# Altium PCB PCB1.PcbDoc
Units mm, origin at the board's own origin, x right, y up, seen from the top; angles counter-clockwise.
Board outline 78 x 72 mm, 2 copper layers (Top Layer, Bottom Layer); 28 components, 23 nets, 128 pads, 13 vias.
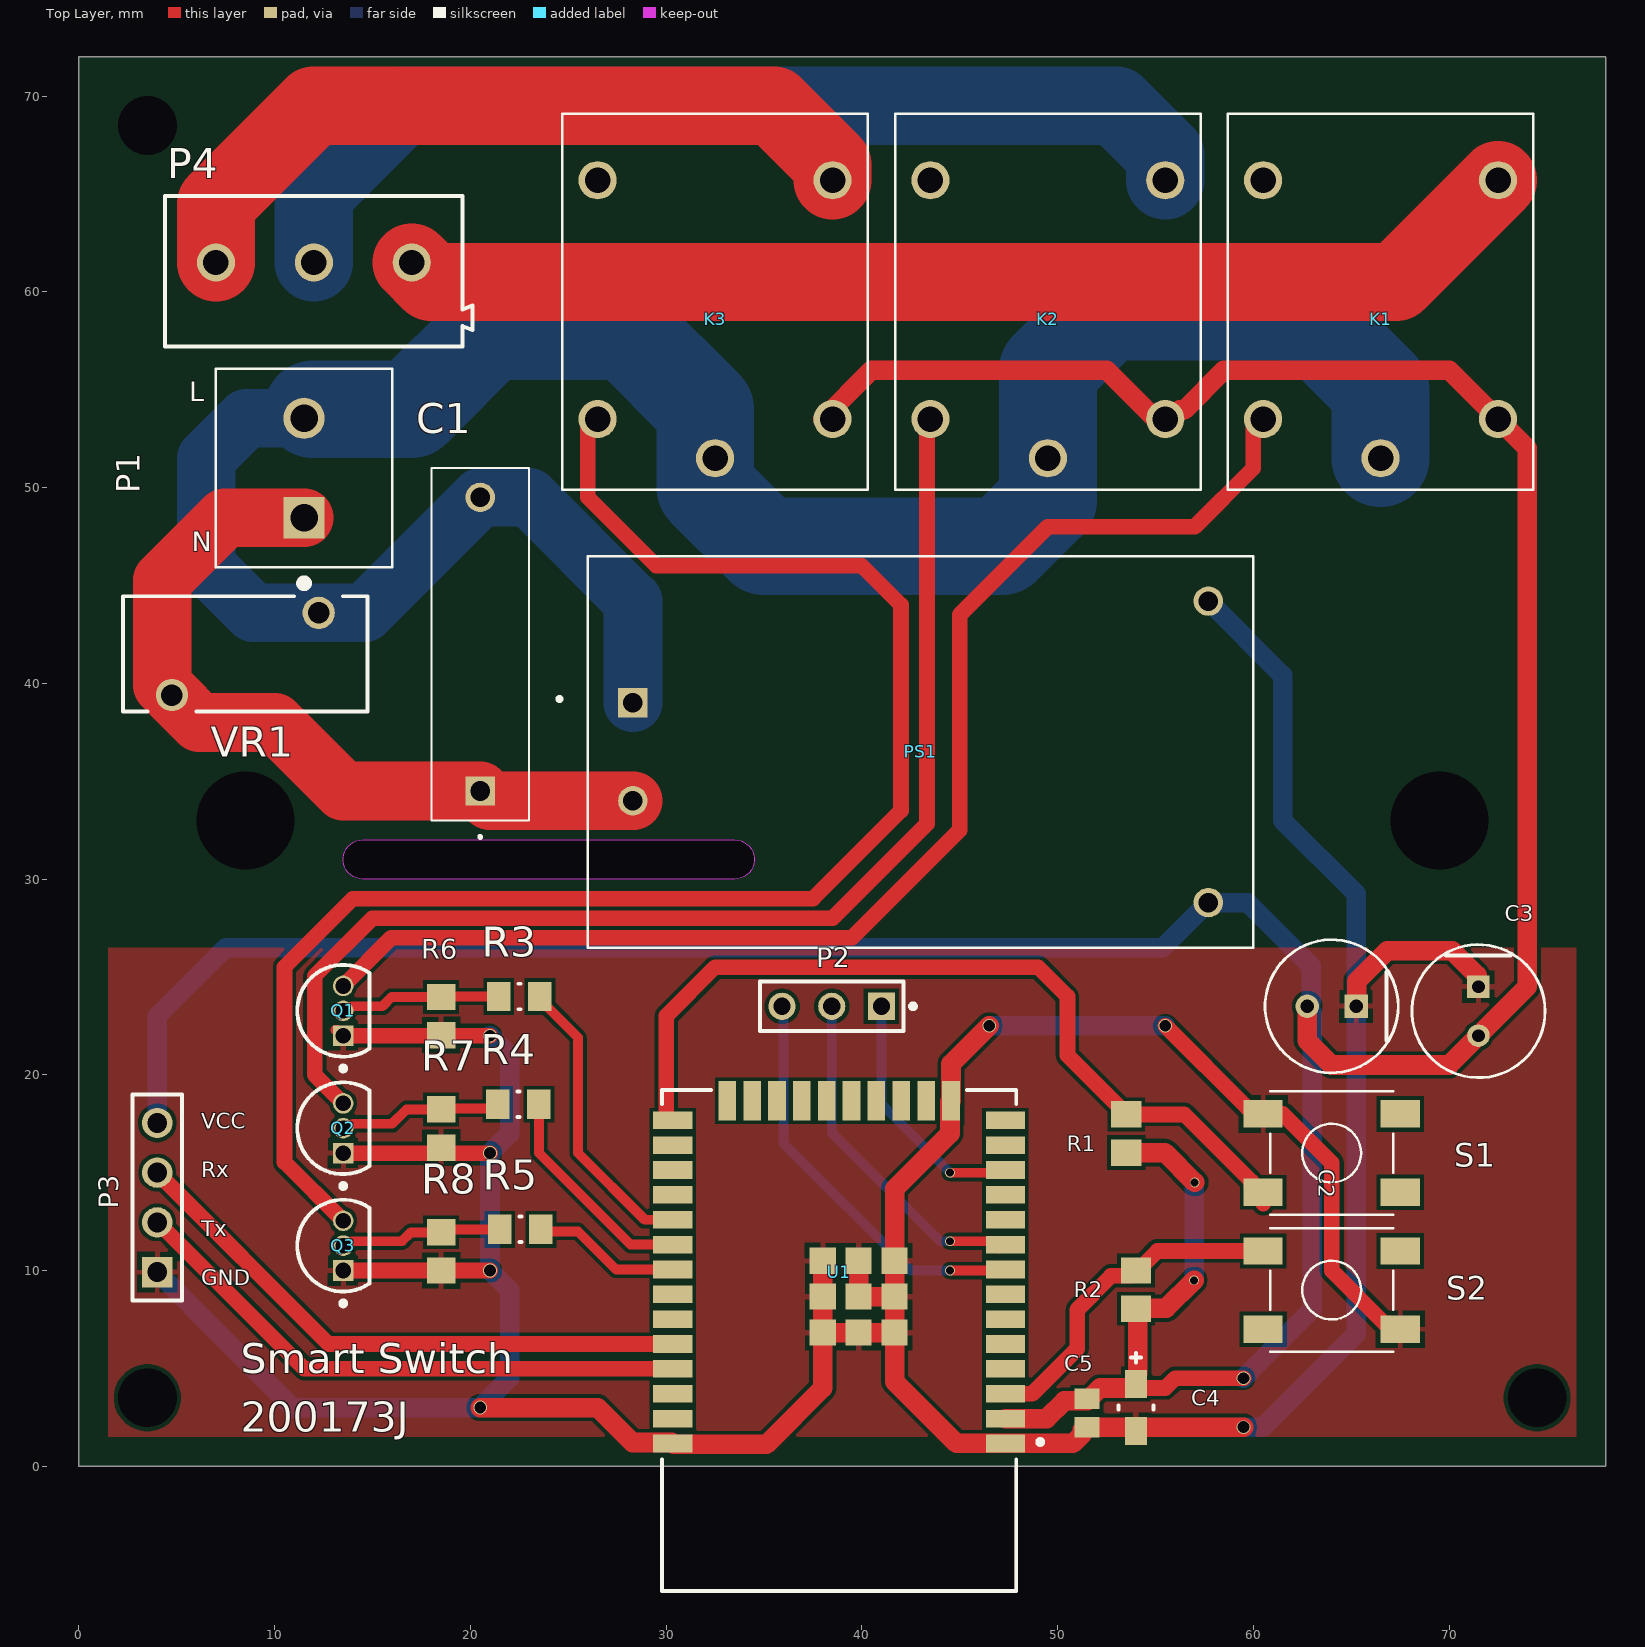
[diagram p0: Top Layer view]
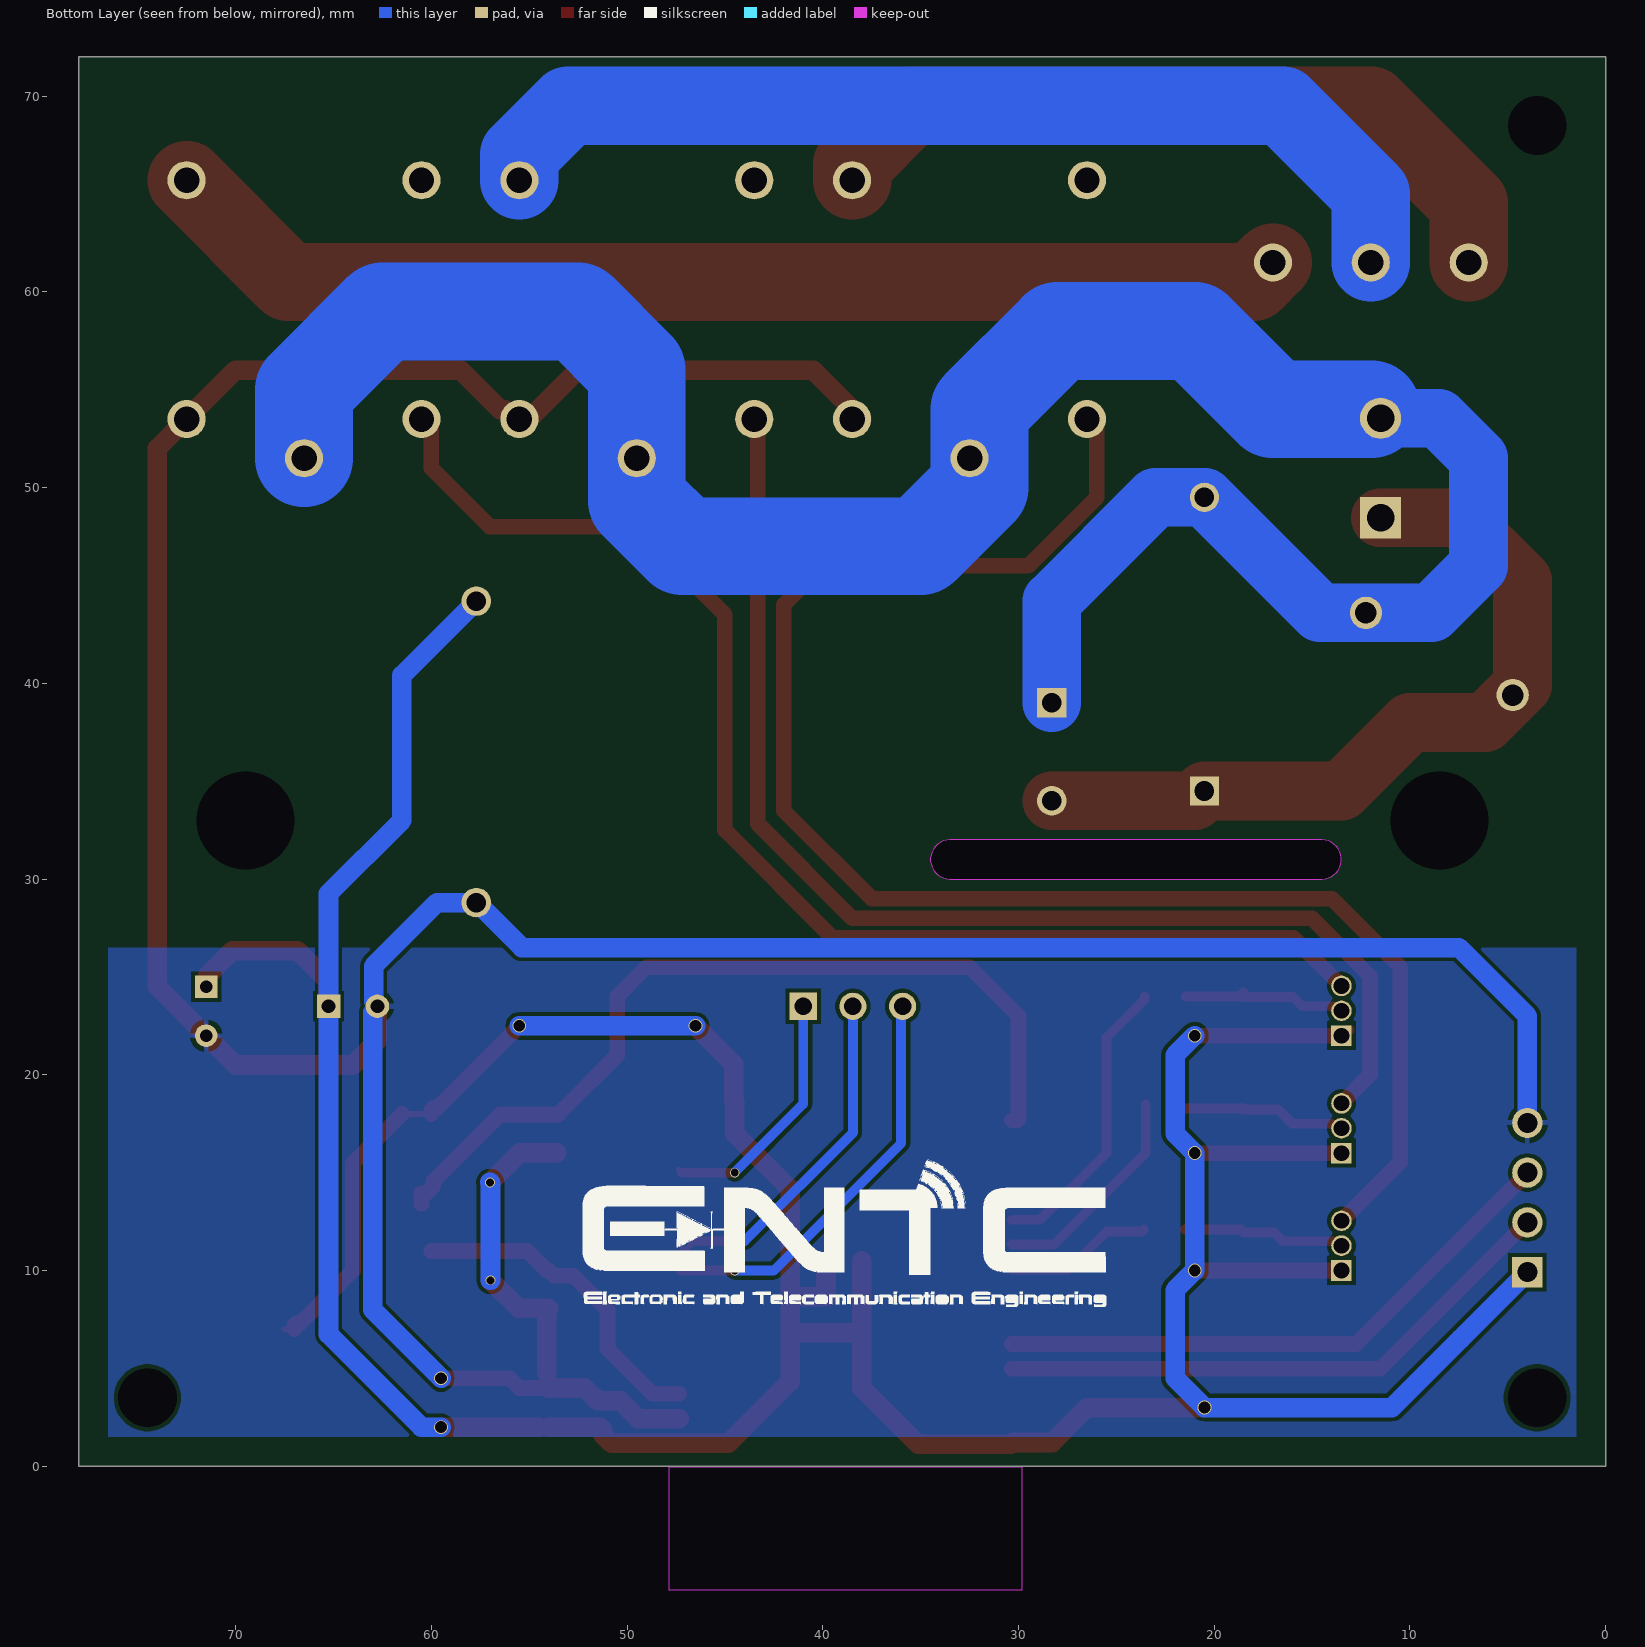
[diagram p1: Bottom Layer view, seen from below]
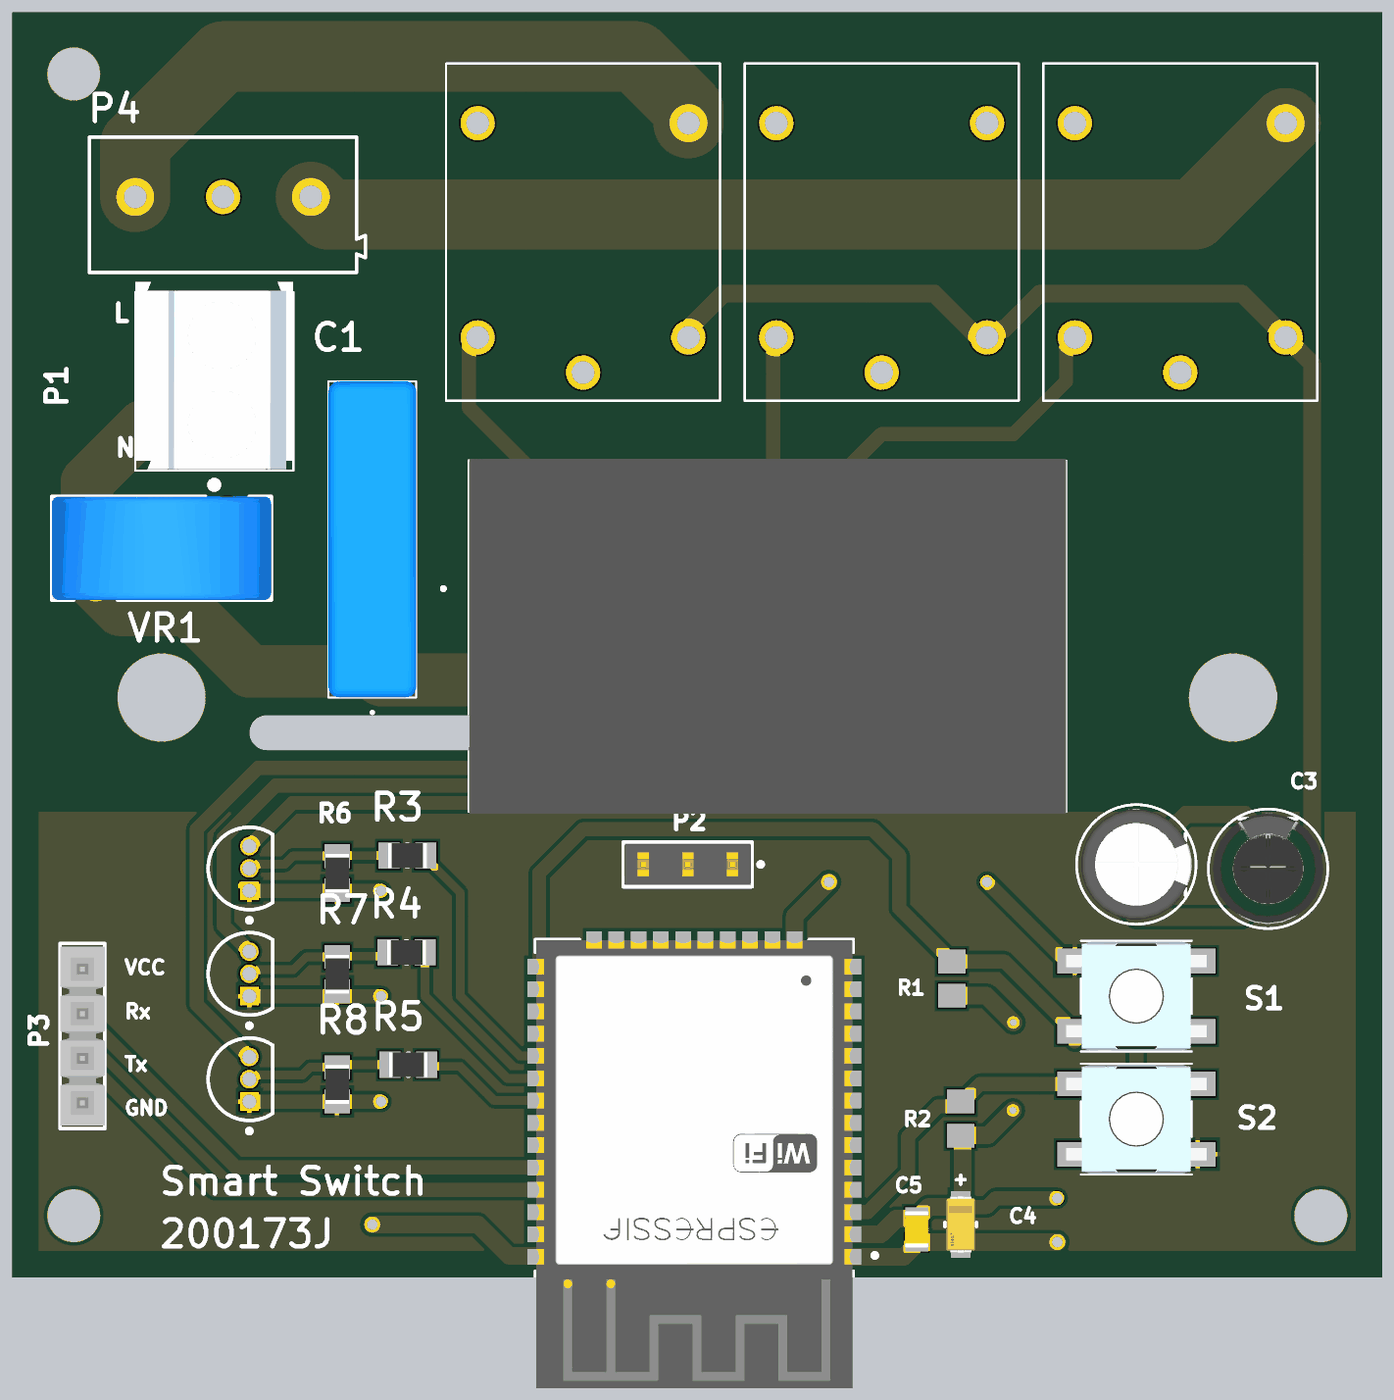
[diagram p2: 3D render of the assembled board from above, using the file's embedded part models]

## Layer stack, top to bottom
Top Solder: solder mask 0.0102, Solder Resist, Dk 3.5
Top Layer: signal copper 0.0356
Dielectric 1: dielectric 0.32, FR-4, Dk 4.8
Bottom Layer: signal copper 0.0356
Bottom Solder: solder mask 0.0102, Solder Resist, Dk 3.5

## Board outline
0,72 0,0 78,0 78,72
cut-out: 14.5,32 33.5,32 cw(c33.5,31) 33.5,30 14.5,30 cw(c14.5,31)

## Design rules (kind name [scope] priority, off if disabled: settings)
Clearance [All] p1: gap=0.2 ignorepadtopadclearanceinfootprint=TRUE except(0.127: Arc-Arc Arc-Track Track-Track SMDPad-SMDPad; 0.254: Arc-Via Track-Via Via-Via; 0.33: Arc-Hole Track-Hole; 0.5: THPad-THPad)
HoleSize [All] p1: absolutevalues=TRUE maxlimit=5 minlimit=0.3 maxpercent=80.000 minpercent=20.000
MinimumSolderMaskSliver [All] p1: minsoldermaskwidth=0.015
PolygonConnect [All] p1: connectstyle=Relief reliefconductorwidth=0.254 reliefentries=4 polygonreliefangle="90 Angle" airgapwidth=0.254
RoutingVias [All] p1: holewidth=0.4 width=0.5 viastyle="Through Hole" minholewidth=0.4 minwidth=0.5 maxholewidth=0.4 maxwidth=0.5
SilkToSilkClearance [All] p1: silktosilkclearance=0.1
SilkToSolderMaskClearance [IsPad] p1: minsilkscreentomaskgap=0.2 clearancetoexposedcopper=TRUE
SolderMaskExpansion [All] p1: expansion=0.102 istentingtop=FALSE
Width [All] p1: maxlimit=5 minlimit=0.2 preferedwidth=0.3
26 further rules are at their usual default settings.

## Classes and differential pairs
component class Sheet2: K1 K2 K3 P4 Q1 Q2 Q3 R3 R4 R5 R6 R7 R8

## Components (designator, comment, footprint, x,y, rotation, side; value= is the part's Value field where it differs from the comment)
C1 "0.1u" B32922X_(18_X_5) 20.5,34.5 r90 top
C2 "220u" FP-RAD-TH-D_6_3_0_5-L_11-MFG 64,23.5 r180 top
C3 "100u" FP-UKL1A101KED1TD-MFG 71.5,23.25 r270 top value=100uF
C4 "10u" FP-T491A106M010AT-MFG 54,3 r90 top
C5 "100n" CAPC2013X95X50LL10T25 51.5,2.725 r90 top value=100nF
K1 "SRD-03VDC-SL-C" RELAY_SRD-03VDC-SL-C 66.5,59.5 r90 top
K2 "SRD-03VDC-SL-C" RELAY_SRD-03VDC-SL-C 49.5,59.5 r90 top
K3 "SRD-03VDC-SL-C" RELAY_SRD-03VDC-SL-C 32.5,59.5 r90 top
P1 "282841-2" TE_282841-2 11.5,51 r90 top
P2 "87224-3" FP-87224-3-MFG 38.46,23.5 r180 top
P3 "TSW-104-08-L-S" SMTC-TSW-104-08-X-S 4,9.92 r90 top
P4 "" 691502710003 12,61.5 r180 top
PS1 "HLK-PM03" CONV_HLK-PM03 43,36.5 r0 top
Q1 "2N7000" ONSC-TO-92-3-29-11 13.5,23.27 r90 top
Q2 "2N7000" ONSC-TO-92-3-29-11 13.5,17.27 r90 top
Q3 "2N7000" ONSC-TO-92-3-29-11 13.5,11.27 r90 top
R1 "10k" RESC2013X70X40ML20T20#1 53.5,17 r270 top
R2 "10k" RESC2013X70X40ML20T20#1 54,9.025 r90 top
R3 "1k" RESC2013X50X35ML15T15 22.5,24 r180 top value=10k
R4 "1k" RESC2013X50X35ML15T15 22.45,18.5 r180 top value=10k
R5 "1k" RESC2013X50X35ML15T15 22.55,12.1 r180 top value=10k
R6 "10k" RESC2013X70X40ML20T20#2 18.5,23 r90 top value=100k
R7 "10k" RESC2013X70X40ML20T20#2 18.5,17.255 r90 top value=100k
R8 "10k" RESC2013X70X40ML20T20#2 18.5,10.975 r90 top value=100k
S1 "430471025826" 430471025826 64,16 r0 top
S2 "430471025826" 430471025826 64,9 r180 top
U1 "ESP32-WROOM-32D" FP-ESP32-WROOM-32D-MFG 38.835,6.425 r180 top
VR1 "MOV-10D561K" MOV10D561K 8.5,41.5 r0 top

## Footprints (in the part's own frame and the unit in brackets; to place one, negate y for a bottom-side part, rotate by r counter-clockwise, add the part's x,y. Pads: shape width x height; smd on the part's side, far side on the other; paste and mask are expansions set on the pad)
430471025826 [mm] "6*6mm vertical type,SMD, height 2.5mm, white actuator, 260gf, T&R"
  rect 2x1.4 smd: 1(-3.5,2) 2(3.5,2) 3(-3.5,-2) 4(3.5,-2)
  silkscreen extent -3.15,-3.15 3.15,3.15, body extent -4,-3.1 4,3.1, height 2.49
691502710003 [mm]
  round 1.95 hole 1.3: 1(-5,0) 2(0,0) 3(5,0)
  silkscreen extent -8.1,-3.4 7.6,4.3
B32922X_(18_X_5) [mm]
  rect 1.5x1.5 hole 1: 1(0,0)
  round 1.5 hole 1: 2(15,0)
  silkscreen extent -2.4,-2.5 16.5,2.5, body extent -1.49,-2.5 16.51,2.5, height 10.36
CAPC2013X95X50LL10T25 [mm] "Chip Capacitor, 2-Leads, Body 2.10x1.35mm, IPC High Density"
  rect 1.05x1.3 smd: 1(-0.725,0) 2(0.725,0)
  body extent -1.05,-0.67 1.05,0.67, height 0.95
CONV_HLK-PM03 [mm]
  rect 1.508x1.508 / inner round 1.508 / far side rect 1.508x1.508 hole 1: 1(-14.7,2.5)
  round 1.508 hole 1: 2(-14.7,-2.5) 3(14.7,7.7) 4(14.7,-7.7)
  silkscreen extent -18.55,-10 17,10, body extent -17,-10.1 17,10.1, height 20
FP-87224-3-MFG [mil]
  rect 54.69x54.69 hole 35 paste-39370.1 mask+0: 1(-100,0)
  round 54.69 hole 35 paste-39370.1 mask+0: 2(0,0) 3(100,0)
  silkscreen extent -168,-50 145,50, body extent -148,-54 148,54, height 10
FP-ESP32-WROOM-32D-MFG [mm]
  rect 2x0.9 smd paste+0 mask+0: 1(-8.5,5.26) 2(-8.5,3.99) 3(-8.5,2.72) 4(-8.5,1.45) 5(-8.5,0.18) 6(-8.5,-1.09) 7(-8.5,-2.36) 8(-8.5,-3.63) 9(-8.5,-4.9) 10(-8.5,-6.17) 11(-8.5,-7.44) 12(-8.5,-8.71) 13(-8.5,-9.98) 14(-8.5,-11.25) 25(8.5,-11.25) 26(8.5,-9.98) 27(8.5,-8.71) 28(8.5,-7.44) 29(8.5,-6.17) 30(8.5,-4.9) 31(8.5,-3.63) 32(8.5,-2.36) 33(8.5,-1.09) 34(8.5,0.18) 35(8.5,1.45) 36(8.5,2.72) 37(8.5,3.99) 38(8.5,5.26)
  rect 0.9x2 smd paste+0 mask+0: 15(-5.715,-12.25) 16(-4.445,-12.25) 17(-3.175,-12.25) 18(-1.905,-12.25) 19(-0.635,-12.25) 20(0.635,-12.25) 21(1.905,-12.25) 22(3.175,-12.25) 23(4.445,-12.25) 24(5.715,-12.25)
  rect 1.33x1.33 smd paste+0 mask+0: 39(-2.835,-0.405) 39(-2.835,-4.075) 39(-2.835,-2.24) 39(-1,-0.405) 39(-1,-2.24) 39(-1,-4.075) 39(0.835,-0.405) 39(0.835,-2.24) 39(0.835,-4.075)
  Keep-Out Layer region: -9,6.45 9,6.45 9,12.75 -9,12.75
  Keep-Out Layer region: -9,6.45 9,6.45 9,12.75 -9,12.75
  silkscreen extent -10.4,-12.8 9.05,12.8, body extent -9.6,-13.35 9.6,12.9, height 0.25
FP-RAD-TH-D_6_3_0_5-L_11-MFG [mm]
  rect 1.2x1.2 hole 0.7 paste-1000 mask+0: 1(-1.25,0)
  round 1.2 hole 0.7 paste-1000 mask+0: 2(1.25,0)
  silkscreen extent -3.4,-3.4 3.4,3.4, body extent -3.5,-3.5 3.5,3.5, height 0.25
FP-T491A106M010AT-MFG [mm]
  rect 1.42x1.13 smd paste+0 mask+0: 1(-1.2,0) 2(1.2,0)
  silkscreen extent -0.12,-0.9 2.8,0.9, body extent -2.03,-1.02 2.03,1.02, height 0.25
FP-UKL1A101KED1TD-MFG [mm]
  rect 1.15x1.15 hole 0.65 paste-1000 mask+0: 1(-1.25,0)
  round 1.15 hole 0.65 paste-1000 mask+0: 2(1.25,0)
  silkscreen extent -3.4,-3.4 3.4,3.4, body extent -3.5,-3.5 3.5,3.5, height 0.25
MOV10D561K [mm]
  round 1.65 hole 1.1: 1(-3.75,-2.1) 2(3.75,2.1)
  silkscreen extent -6.25,-2.95 6.25,2.95, body extent -6.25,-2.95 6.25,2.95, height 14.94
ONSC-TO-92-3-29-11 [mm] "TO, 3-Leads, Body Dia 4.7mm, Pitch 1.27mm"
  rect 1.05x1.05 hole 0.8: 1(-1.27,0)
  round 1.05 hole 0.8: 2(0,0) 3(1.27,0)
  silkscreen extent -3.07,-1.34 2.35,2.35, body extent -2.35,-1.33 2.36,2.36, height 7.87
RELAY_SRD-03VDC-SL-C [mm]
  round 1.95 hole 1.3: COIL1(-6,6) COIL2(-6,-6) COM(-8,0) NC(6.2,6) NO(6.2,-6)
  silkscreen extent -9.6,-7.8 9.6,7.8
RESC2013X50X35ML15T15 [mm] "Chip Resistor, 2-Leads, Body 2.2x1.4mm, IPC Low Density"
  rect 1.2x1.5 smd: 1(-1.05,0) 2(1.05,0)
  silkscreen extent -0.05,-0.65 0.05,0.65, body extent -1.1,-0.7 1.1,0.7, height 0.5
RESC2013X70X40ML20T20#1 [mm] "Chip Resistor, 2-Leads, Body 2.00x1.25mm, IPC Low Density"
  rect 1.35x1.55 smd: 1(-0.975,0) 2(0.975,0)
  body extent -1.1,-0.72 1.1,0.72, height 0.7
RESC2013X70X40ML20T20#2 [mm] "Chip Resistor, 2-Leads, Body 2.2x1.35mm, IPC Low Density"
  rect 1.35x1.45 smd: 1(-0.975,0) 2(0.975,0)
  body extent -1.1,-0.67 1.1,0.67, height 0.7
SMTC-TSW-104-08-X-S [mm] ".025 SQ Post Terminal Strip Assembly, 1x4 Pins, Vertical, 2.54mm Pitch, Male"
  rect 1.55x1.55 hole 1.02: 1(0,0)
  round 1.55 hole 1.02: 2(2.54,0) 3(5.08,0) 4(7.62,0)
  silkscreen extent -1.46,-1.27 9.08,1.27, body extent -1.27,-1.27 8.89,1.27, height 8.38
TE_282841-2 [mm]
  rect 2.1x2.1 / inner round 2.1 / far side rect 2.1x2.1 hole 1.4: 1(-2.54,0)
  round 2.1 hole 1.4: 2(2.54,0)
  silkscreen extent -6.09,-4.5 5.08,4.5, body extent -5,-4.5 5.66,4.5, height 15

## Part data
C1: library part B32922X2104K000, "Safety Capacitor", Manufacturer_Name=TDK, Mouser Part Number=871-B32922X2104K000, Arrow Part Number=B32922X2104K000, Arrow Price/Stock=https://www.arrow.com/en/products/b32922x2104k000/epcos-tdk?region=nac, Datasheet Link=https://product.tdk.com/system/files/dam/doc/product/capacitor/film/emi/data_sheet/20/20/db/fc_2009/x2_b32921_923_xy.pdf, Height=10.5mm, Manufacturer_Part_Number=B32922X2104K000, Mouser Price/Stock=https://www.mouser.co.uk/ProductDetail/EPCOS-TDK/B32922X2104K000?qs=TuK3vfAjtkWDVip5zaCELA%3D%3D
C2: library part CMP-05427-001329-1, "Aluminum Electrolytic Capacitors (Radial Lead Type) 220uF ±20% 10V", Capacitance=220uF, Case/Package=Radial, Dielectric Material=Aluminium, ESR (Equivalent Series Resistance)=130mR, Leakage Current=10nA, Max Operating Temperature=105°C, Min Operating Temperature=-40°C, Package Quantity=200, Ripple Current=455mA, Tolerance=20%, Voltage=10V, Construction=RADIAL, Contact Plating=Tin, Diameter=6mm, Dissipation Factor=0.19%, Height=11.2mm, Height - Seated (Max)=0.5inch, Impedance=130mR, Lead Diameter=0.5mm, Lead Free="Lead Free", Lead Length=17mm, Lead Pitch=2.5mm, Length=11mm, Life (Hours)=2000Hour, Mount="Through Hole", Number of Pins=2, Outside Diameter=6mm, Packaging=Bulk, Radiation Hardening=No, Ripple Current (AC)=455mA, RoHS Compliant=Yes, Series=FM, Termination=Radial, Voltage Rating=10V, Voltage Rating (DC)=10V
C3: library part CMP-12462-000006-1, "CAP ALUM 100UF 10% 10V RADIAL", Capacitance=100uF, Leakage Current=2uA, Manufacturer=Nichicon, Manufacturer Part Number=UKL1A101KED1TD, Package=0, Ripple Current=180mA, Temperature="-40°C to +85°C", Temperature Range High=+85°C, Temperature Range Low=-40°C, Tolerance=10%, Voltage Rating=10V, Automotive=No, Category=Cap, ComponentLink2Description=Datasheet, ComponentLink2URL=https://www.nichicon.co.jp/english/products/pdfs/e-ukl.pdf, Device Class L1="Passive Components", Device Class L2=Capacitors, Device Class L3="Aluminum Electrolytic Capacitors", Digikey Description="CAP ALUM 100UF 10% 10V RADIAL", Dissipation Factor=15%, Height=12mm, Lead Free=Yes, Life=2000Hours, Material=Aluminum, Octopart=https://octopart.com/ukl1a101ked1td-nichicon-20309866, RoHS=TRUE
C4: library part CMP-03017-000010-1, "CAP TANT 10UF 20% 10V 1206", Capacitance=10uF, Case Code (Imperial)=1206, Case Code (Metric)=3216, Dielectric Material=Tantalum, ESR (Equivalent Series Resistance)=4R, Leakage Current=1uA, Max Operating Temperature=125°C, Min Operating Temperature=-55°C, Package Quantity=2000, Tolerance=20%, Voltage=10V, Case/Package=1206, Construction=Flat, Depth=1.6mm, Dissipation Factor=6%, Features="General Purpose", Height=1.6mm, Height - Seated (Max)=0.071inch, Lead Free="Lead Free", Lead Pitch=1.2mm, Length=3.2mm, Life (Hours)=2000Hour, Mount="Surface Mount", Number of Pins=2, Packaging="Tape and Reel", Polarity=Polar, Radiation Hardening=No, REACH SVHC="No SVHC", RoHS Compliant=Yes, Series=T491, Size=1.6mm, Termination=SMD/SMT, Voltage Rating=10V, Voltage Rating (DC)=10V, Weight=0.000571oz, Width=0.063inch
C5: library part CMP-001-00018-6, "Chip Capacitor, 100 nF, +/- 10%, 50 V, 0805 (2012 Metric)", Capacitor Type=Ceramic, Case/Package=0805, Max Operating Temperature=125°C, Min Operating Temperature=-55°C, Tolerance=10%, Voltage Rating=50V, Mounting Technology=SM, Pins=2, RoHS Compliant=True
K1 K2 K3: "Relays General Purpose Non Latching 3VDC SPDT 10A (250VAC) Max 5PIN", Package=Package, Availability="Not in stock", Check_prices=https://www.snapeda.com/parts/SRD-03VDC-SL-C/Songle+Relay/view-part/?ref=eda, MF="Songle Relay", MP=SRD-03VDC-SL-C, Price=None, SnapEDA_Link=https://www.snapeda.com/parts/SRD-03VDC-SL-C/Songle+Relay/view-part/?ref=snap
P1: library part CMP-002-00071-1, "Conn Terminal Block 2 POS 5.08mm Solder ST Thru-Hole 17.5A/Contact", Case/Package=None, Availability="In Stock", Check_prices=https://www.snapeda.com/parts/282841-2/TE+Connectivity+AMP+Connectors/view-part/?ref=eda, Component Type=Standard, Design Item ID=282841-2, EU_RoHS_Compliance="Compliant with Exemptions", MF="TE Connectivity", MP=282841-2, Pins=2, Price=None, Purchase-URL=https://pricing.snapeda.com/search/part/282841-2/?ref=eda, SnapEDA_Link=https://www.snapeda.com/parts/282841-2/TE+Connectivity+AMP+Connectors/view-part/?ref=snap, Source=282841-2.SchLib
P2: library part CMP-2000-05697-2, "CONN HEADER VERT 3POS 2.54MM", Color=Black, Contact Current Rating=3A, Flammability Rating="UL94 V-0", High Temperature Housing=No, Max Operating Temperature=105°C, Min Operating Temperature=-65°C, Package Quantity=520, Approvals=CSA, Board Standoff="No (Without)", Connector Type=Plug, Contact Gender=Male, Contact Material=Bronze, Contact Mating Length=8.08mm, Contact Plating=Gold, Contact Post Length=0.125inch, Contact Protection="No (Without)", Contact Shape=Square, Contact Type="Male Pin", Current Rating=3A, Depth=2.54mm, ELV=Compliant, Gasket="No (Without)", High Speed Serial Data Connector=No, Housing Color=Black, Housing Material=Thermoplastic, Keyed=No, Lead Free="Lead Free", Length=7.21mm, Mating Alignment="No (Without)", Mating Connector Lock="No (Without)", Mount="Through Hole", Number of Contacts=3, Number of Positions=3, Number of Rows=1, Orientation=Straight, Packaging=Carton, PCB Mount Retention=Without, PCB Mounting Orientation=Vertical, PCB Thickness=1.397mm, Pitch=2.54mm, Radiation Hardening=No, RoHS Compliant=Yes, Row Spacing=2.54mm, Selectively Loaded="No (Without)", Series="AMPMODU MOD II", Stabilizers="No (Without)", Strain Relief="No (Without)", Termination="Through Hole"
P3: library part CMP-1024-00358-1, "0.025\" SQ Post Header, Through-hole, Vertical, -55 to 125 degC, 2.54 mm Pitch, 4-Pin, Male, RoHS", Manufacturer=Samtec, Temperature Range="-55 to 125 degC", ComponentLink1Description="Manufacturer URL", ComponentLink1URL=http://www.samtec.com, ComponentLink2Description=Datasheet, ComponentLink2URL=http://www.samtec.com/documents/webfiles/pdf/TSW_TH.PDF, ComponentLink3Description="Package Specification", ComponentLink3URL=http://www.samtec.com/documents/webfiles/cpdf/TSW-XXX-XX-XXX-X-XX-XXX-MKT.pdf, DatasheetVersion=F-214, Mounting Technology=Through-hole, Orientation=Vertical, PackageDescription=".025[0.64] SQ. Post Terminal Strip Assembly", PackageReference=TSW-104-08-X-S, PackageVersion="DM, 8/1988", PartNumber=TSW-104-08-L-S, Pitch="2.54 mm", RoHS=True
P4: library part CMP-003-000000-1, "5.00 MM TERMINAL BLOCK, HORIZONT", Package=None, Availability="In Stock", Check_prices=https://www.snapeda.com/parts/691502710003/Wurth+Electronics+Inc./view-part/?ref=eda, Component Type=Standard, Design Item ID=691502710003, MF="WÃ¼rth Elektronik", MP=691502710003, Pin Count=3, Price=None, Purchase-URL=https://pricing.snapeda.com/search/part/691502710003/?ref=eda, SnapEDA_Link=https://www.snapeda.com/parts/691502710003/Wurth+Electronics+Inc./view-part/?ref=snap, Source=691502710003.SchLib
PS1: library part CMP-005-000000-1, Package=Package, Availability="Not in stock", Check_prices=https://www.snapeda.com/parts/HLK-PM03/Hi-link/view-part/?ref=eda, Component Type=Standard, Design Item ID=HLK-PM03, MF=Hi-link, MP=HLK-PM03, Pin Count=4, Price=None, SnapEDA_Link=https://www.snapeda.com/parts/HLK-PM03/Hi-link/view-part/?ref=snap, Source=HLK-PM03.SchLib
Q1 Q2 Q3: library part CMP-1058-00936-1, "Small Signal MOSFET, 200 mA, 60 V, N-Channel, 3-Pin TO-92, Bulk Box", Manufacturer="On Semiconductor", Package Type=TO-92, Channel Polarity="N Channel", Ciss Typ (pF)=60, ComponentLink1Description="Manufacturer URL", ComponentLink1URL=http://www.onsemi.com/, ComponentLink2Description=Datasheet, ComponentLink2URL=http://www.onsemi.com/pub_link/Collateral/2N7000-D.PDF, ComponentLink3Description="Package Specification", ComponentLink3URL=http://www.onsemi.cn/pub_link/Collateral/2N6426-D.PDF, Configuration=Single, Coss Typ (pF)=25, Crss Typ (pF)=5, DatasheetVersion="Rev. 8", ID Max (A)=0.2, Mounting Technology="Through Hole", PackageDescription="3-Pin Transistor Outline, Body 4.825 x 3.685 mm, Pitch 1.27 mm", PackageReference=TO-92-3-29-11_AM_SL, PackageVersion="Rev. AM", Packing="Bulk Box", PartNumber=2N7000, PD Max (W)=0.35, V(BR)DSS Min (V)=60, VGS Max (V)=20, VGS(th) Max (V)=3
R1 R2: library part CMP-2001-04376-1, "ERJ-6ENF1002V", Manufacturer=Panasonic, Part Number=ERJ-6ENF1002V
R3 R4 R5: library part CMP-009-00018-5, "Chip Resistor, 10 KOhm, +/- 1%, 125 mW, -55 to 155 degC, 0805 (2012 Metric)", Case/Package=0805, Max Operating Temperature=155°C, Min Operating Temperature=-55°C, Power=125mW, Tolerance=1%, Voltage Rating=150V, Mounting Technology=SM, Pins=2, RoHS Compliant=True
R6 R7 R8: library part CMP-009-00024-5, "Chip Resistor, 100 KOhm, +/- 1%, 0.125 W, -55 to 155 degC, 0805 (2012 Metric)", Case/Package=0805, Max Operating Temperature=155°C, Min Operating Temperature=-55°C, Power=125mW, Tolerance=1%, Voltage Rating=150V, Mounting Technology=SM, Pins=2, RoHS Compliant=True
S1 S2: library part CMP-1452-00022-1, "WS-TASV SMD Tact Switch 6X6 mm", Manufacturer="Wuerth Elektronik", ComponentLink1Description="Manufacturer URL", ComponentLink1URL=http://www.we-online.com, ComponentLink2Description=Datasheet, ComponentLink2URL=http://katalog.we-online.de/em/datasheet/4304x1.pdf, NoPins=04, PackageReference=430471025826, PartNumber=430471025826
U1: library part CMP-194065-000003-1, "WIFI MODULE 32MBITS SPI FLASH", Manufacturer="Espressif Systems", Max Frequency=2484MHz, Max Supply Voltage=3.6V, Min Supply Voltage=3V, Nominal Supply Current=500mA, Temperature="-40°C to +85°C", Temperature Range High=+85°C, Temperature Range Low=-40°C, Automotive=No, Bandwidth=72MHz, Category=UNK, ComponentLink2Description=Datasheet, ComponentLink2URL=https://www.espressif.com/sites/default/files/documentation/esp32-wroom-32d_esp32-wroom-32u_datasheet_en.pdf, Data Rate=150Mbits/s, Device Class L1="Integrated Circuits (ICs)", Device Class L2="RF Semiconductors and Devices", Device Class L3=Transceivers, Digikey Description="WIFI MODULE 32MBITS SPI FLASH", Height=3.2mm, Interface=I2C,SPI,UART,Ethernet,I2S,Other, Lead Free=Yes, Manufacturer Part Number=ESP32-WROOM-32D, Mouser Description="Wi-Fi/BT BLE Module ESP32-D0WD, SPI Flash, UART, P", Number Of Adc Channels=16, Number Of Gpio=32, Octopart=https://octopart.com/esp32-wroom-32d-espressif+systems-91040050, Package=ESP32-WROOM-32D, RoHS=TRUE, Sensitivity=-98dBm
VR1: "Varistor", Manufacturer_Name=Bourns, Mouser Part Number=652-MOV-10D561K, Arrow Part Number=MOV-10D561K, Arrow Price/Stock=https://www.arrow.com/en/products/mov-10d561k/bourns?region=nac, Datasheet Link=https://www.bourns.com/docs/Product-Datasheets/MOV10D.pdf, Height=15.5mm, Manufacturer_Part_Number=MOV-10D561K, Mouser Price/Stock=https://www.mouser.co.uk/ProductDetail/Bourns/MOV-10D561K?qs=lgttKnAd%252B2ArrqGQgWwr6w%3D%3D

## Free pads (board coordinates)
  round 1.524 hole 3: 3(3.5,68.5) 5(74.5,3.5) 6(3.5,3.5)
  round 1.524 hole 5: 7(69.5,33) 8(8.5,33)

## Via types
v1: diameter 0.7, hole 0.6, Top Layer to Bottom Layer, 8 vias
v2: diameter 0.5, hole 0.4, Top Layer to Bottom Layer, 5 vias

## Nets (pads, with @x,y where several pads share a name; then routed paths per layer and width w, separated by ;. In a path a pad name is that pad's centre, name@x,y a point inside that pad or via, vN(x,y) a via of type N, cw(c..) or ccw(c..) an arc to the next point about the centre after c; other vN are vias at no path point)
3.3V: C2.2 C3.2 C4.2 C5.2 K1.COIL2 K2.COIL2 K3.COIL2 P3.4 PS1.4 R1.2 R2.1 U1.2 | length 201.9
  Top Layer w0.8: C4.2@54.5,4 55.5,4 56,4.5 v1(59.5,4.5)
  Top Layer w1: K3.COIL2@38,53.5 40.5,56 52.5,56 K2.COIL2@55,53.5 ; U1.2 49.435,2.435 50.339,3.339 C5.2@51.514,3.339 ; C5.2 C5.2@51.625,3.45 ; C5.2@51.514,3.425 51.6,3.425 C5.2@51.625,3.45 ; R1.2@53.6,16.025 55.475,16.025 v2(57,14.5) ; C4.2@54,4 52.175,4 C5.2@51.625,3.45 ; R2.1 54.023,8.073 55.548,8.073 v2(56.973,9.498) ; C4.2@54.1,4.745 R2.1@54.1,8.05 ; K2.COIL2 55.757,53.5 56.232,53.975 56.475,53.975 58.5,56 70,56 K1.COIL2 74,52 74,24.5 C3.2 70,20.5 64,20.5 62.75,21.75 C2.2
  Bottom Layer w1: P3.4 4,23 7.5,26.5 55.377,26.5 57.544,28.667 PS1.4@57.667,28.667 ; v2(56.973,9.498) 56.973,14.473 v2(57,14.5) ; PS1.4 59.7,28.8 62.95,25.55 62.95,23.754 62.788,23.592 C2.2@62.788,23.408 ; v1(59.5,4.5) 63,8 C2.2@63,23.196
Btn1: P2.1 U1.12 | length 12.8
  Top Layer w0.3: U1.12@47.2,15 U1.12
  Top Layer w0.5: v2(44.5,15) U1.12@47.2,15
  Bottom Layer w0.5: P2.1 41,18.5 v2(44.5,15)
Btn2: P2.2 U1.9 | length 18
  Top Layer w0.3: U1.9@46.56,11.5 47.035,11.025 U1.9
  Top Layer w0.5: v2(44.5,11.5) U1.9@46.56,11.5
  Bottom Layer w0.5: P2.2 38.46,17.04 44,11.5 v2(44.5,11.5)
Btn3: P2.3 U1.8 | length 21.1
  Top Layer w0.3: U1.8@47.28,10 U1.8
  Top Layer w0.5: v2(44.5,10) U1.8@47.28,10
  Bottom Layer w0.5: P2.3 36,23.42 36,16.5 42.5,10 v2(44.5,10)
GND: C2.1 C3.1 C4.1 C5.1 P3.1 PS1.3 Q1.1 Q2.1 Q3.1 R6.1 R7.1 R8.1 S1.1 S2.1 U1.1 U1.15 U1.38 U1.39 | length 223.9
  Top Layer w0.3: S1.1 61.5,18 ; S2.1@67,7 S2.1
  Top Layer w0.5: Q1.1@13.096,22.295 13.205,22.295 Q1.1
  Top Layer w0.8: Q3.1 R8.1 v1(21,10) ; Q2.1 v1(21,16) ; Q1.1 v1(21,22) ; v1(55.5,22.5) 59.7,18.3 59.9,18.3 60,18.2 S1.1@60,18 ; 61.5,18 64,15.5 64,10 66.7,7.3 66.9,7.3 67,7.2 S2.1@67,7
  Top Layer w1: v1(20.5,3) 26.5,3 28.285,1.215 30.285,1.215 U1.38 30.385,1.115 35.115,1.115 38,4 U1.39@38,6.83 ; U1.39@38,10.5 38,8.665 U1.39@38,6.83 ; U1.39@39.835,10.5 39.835,8.665 U1.39@41.67,8.665 ; v1(46.5,22.5) 44.55,20.55 U1.15 44.5,18.625 44.5,17 41.67,14.17 41.67,10.5 U1.39@41.67,8.665 ; C4.1@54,2 C5.1 51.375,2 51.25,1.875 51.25,1.634 50.781,1.165 U1.1 44.835,1.165 41.67,4.33 U1.39@41.67,6.83 ; C4.1@54.5,2 v1(59.5,2) ; C2.1 65.286,23.536 65.286,24.786 66.846,26.346 70.154,26.346 71.425,25.075 71.425,24.575 C3.1@71.575,24.575 ; U1.39@38,6.83 39.835,6.83 U1.39@41.67,6.83 ; U1.39@41.67,6.83 U1.39@41.67,8.665
  Bottom Layer w1: P3.1 7.42,6.5 10.92,3 v1(20.5,3) 22,4.5 22,9 v1(21,10) v1(21,16) 22,17 22,21 v1(21,22) ; v1(46.5,22.5) v1(55.5,22.5) ; PS1.3 61.5,40.4 61.5,33 65.25,29.25 C2.1 ; v1(59.5,2) 60.5,2 65.25,6.75 C2.1 ; C2.1@65.35,23.6 C2.1
Live: C1.2 K1.COM K2.COM K3.COM P1.2 PS1.1 VR1.2 | length 121.1
  Bottom Layer w3: P1.2 8.54,53.54 6.5,51.5 6.5,46 8.9,43.6 VR1.2 14.6,43.6 C1.2 23,49.5 28.3,44.2 PS1.1
  Bottom Layer w5: P1.2@11.96,54 17,54 21,58 28,58 32,54 32,50 35,47 47.157,47 49.5,49.343 K2.COM 49.5,56 52.5,59 62.5,59 66.5,55 K1.COM
NetC1_1: C1.1 P1.1 PS1.2 VR1.1 | length 40.4
  Top Layer w3: P1.1 7.46,48.46 4.25,45.25 4.25,39.9 VR1.1 6.15,38 10,38 13.5,34.5 C1.1 21,34 PS1.2
NetK1_COIL1: K1.COIL1 Q1.3 | length 66.4
  Top Layer w0.8: Q1.3 15.96,27 39.5,27 45,32.5 45,43.5 49.5,48 57,48 60,51 K1.COIL1@60,53.5
NetK2_COIL1: K2.COIL1 Q2.3 | length 62.4
  Top Layer w0.8: Q2.3 12.04,20 12.04,25.04 15,28 38.5,28 43.323,32.823 43.323,53.177 K2.COIL1@43,53.5
NetK3_COIL1: K3.COIL1 Q3.3 | length 81.8
  Top Layer w0.8: Q3.3 10.5,15.54 10.5,25.5 14,29 37.5,29 42,33.5 42,44 40,46 29.5,46 26,49.5 26,53.3 K3.COIL1@26,53.5
NetQ1_2: Q1.2 R3.2 R6.2 | length 8.3
  Top Layer w0.3: Q1.2 13.703,23.27 Q1.2@13.933,23.5
  Top Layer w0.5: Q1.2@13.933,23.5 15.5,23.5 15.975,23.975 R6.2 ; R6.2@18.5,24.2 18.7,24 R3.2
NetQ2_2: Q2.2 R4.2 R7.2 | length 7.8
  Top Layer w0.5: 14,17.5 16,17.5 16.73,18.23 R7.2 18.55,18.28 R4.2@21.5,18.28
NetQ3_2: Q3.2 R5.2 R8.2 | length 8.3
  Top Layer w0.5: Q3.2 13.703,11.27 13.933,11.5 16.5,11.5 16.95,11.95 R8.2 18.65,12.1 R5.2
NetR1_1: R1.1 S1.3 U1.25 | length 44
  Top Layer w0.8: U1.25 30.05,17.675 30,17.725 30,23 32.5,25.5 49,25.5 50.5,24 50.5,21 R1.1@53.25,18.25 ; R1.1 56.475,17.975 59.9,14.55 59.9,14.3 60.25,13.95 60.5,13.95 S1.3@60.5,13.418
NetR2_2: R2.2 S2.4 U1.3 | length 16.9
  Top Layer w0.8: U1.3 48.705,3.705 51,6 51,8 52.725,9.725 53.725,9.725 R2.2 54.1,10 55.1,11 59.5,11 S2.4@60,11
PWR_OUT_1: K1.NO P4.1 | length 58.1
  Top Layer w4: P4.1 18,60.5 67.3,60.5 K1.NO
PWR_OUT_2: K2.NO P4.2 | length 51.2
  Bottom Layer w4: P4.2 12,65 16.5,69.5 53,69.5 55.5,67 K2.NO
PWR_OUT_3: K3.NO P4.3 | length 38.6
  Top Layer w4: P4.3 7,64.5 12,69.5 35.5,69.5 38.5,66.5 K3.NO
RX: P3.3 U1.34 | length 30
  Top Layer w0.8: P3.3 12.755,6.245 U1.34
Switch1: R3.1 U1.29 | length 15.1
  Top Layer w0.5: R3.1 23.55,23.85 25.5,21.9 25.5,16 28.905,12.595 U1.29
Switch2: R4.1 U1.30 | length 11.3
  Top Layer w0.5: R4.1 23.5,16 28.175,11.325 U1.30
Switch3: R5.1 U1.31 | length 7.6
  Top Layer w0.5: R5.1 23.7,12 25.5,12 27.445,10.055 U1.31
TX: P3.2 U1.35 | length 29.4
  Top Layer w0.8: P3.2 4.04,12.46 11.525,4.975 U1.35
pads on no net: K1.NC K2.NC K3.NC S1.2 S1.4 S2.2 S2.3 U1.4 U1.5 U1.6 U1.7 U1.10 U1.11 U1.13 U1.14 U1.16 U1.17 U1.18 U1.19 U1.20 U1.21 U1.22 U1.23 U1.24 U1.26 U1.27 U1.28 U1.32 U1.33 U1.36 U1.37

## Polygon pours and split planes (outlines as drawn)
no net on Multi-Layer "NONET_L-01_P-001" (hatched 45Degree grid 0.508 track 0.203, remove dead copper): 81.5,25 81,25 80,26
3.3V on Bottom Layer "VCC_L02_P009" (solid, pour order 9): 1.5,26.5 1.5,1.5 76.5,1.5 76.5,26.5
GND on Top Layer "GND_L01_P008" (solid, pour order 8): 1.5,1.5 76.5,1.5 76.5,26.5 1.5,26.5

## Silkscreen, mask and mechanical layers (free items; w line width, h text height)
Top Overlay:
  text "L" at 5.63,54.421 h1
  text "N" at 5.754,46.754 h1
  text "VCC" at 6.254,17.254 h0.8
  text "Rx" at 6.254,14.754 h0.8
  text "Tx" at 6.254,11.754 h0.8
  text "GND" at 6.254,9.254 h0.8
  text "Smart Switch" at 8.254,4.754 h1.52
  text "200173J" at 8.254,1.754 h1.52
Bottom Overlay:
  drawing of 85 lines, arcs and shapes, not listed
Mechanical 1:
  the board outline again, w1